# Altium PCB PCB1 (1).PcbDoc
Units mil, origin at the board's own origin, x right, y up, seen from the top; angles counter-clockwise.
Board outline 4500 x 2400 mil, 2 copper layers (Top Layer, Bottom Layer); 9 components, 22 nets, 71 pads, 0 vias.
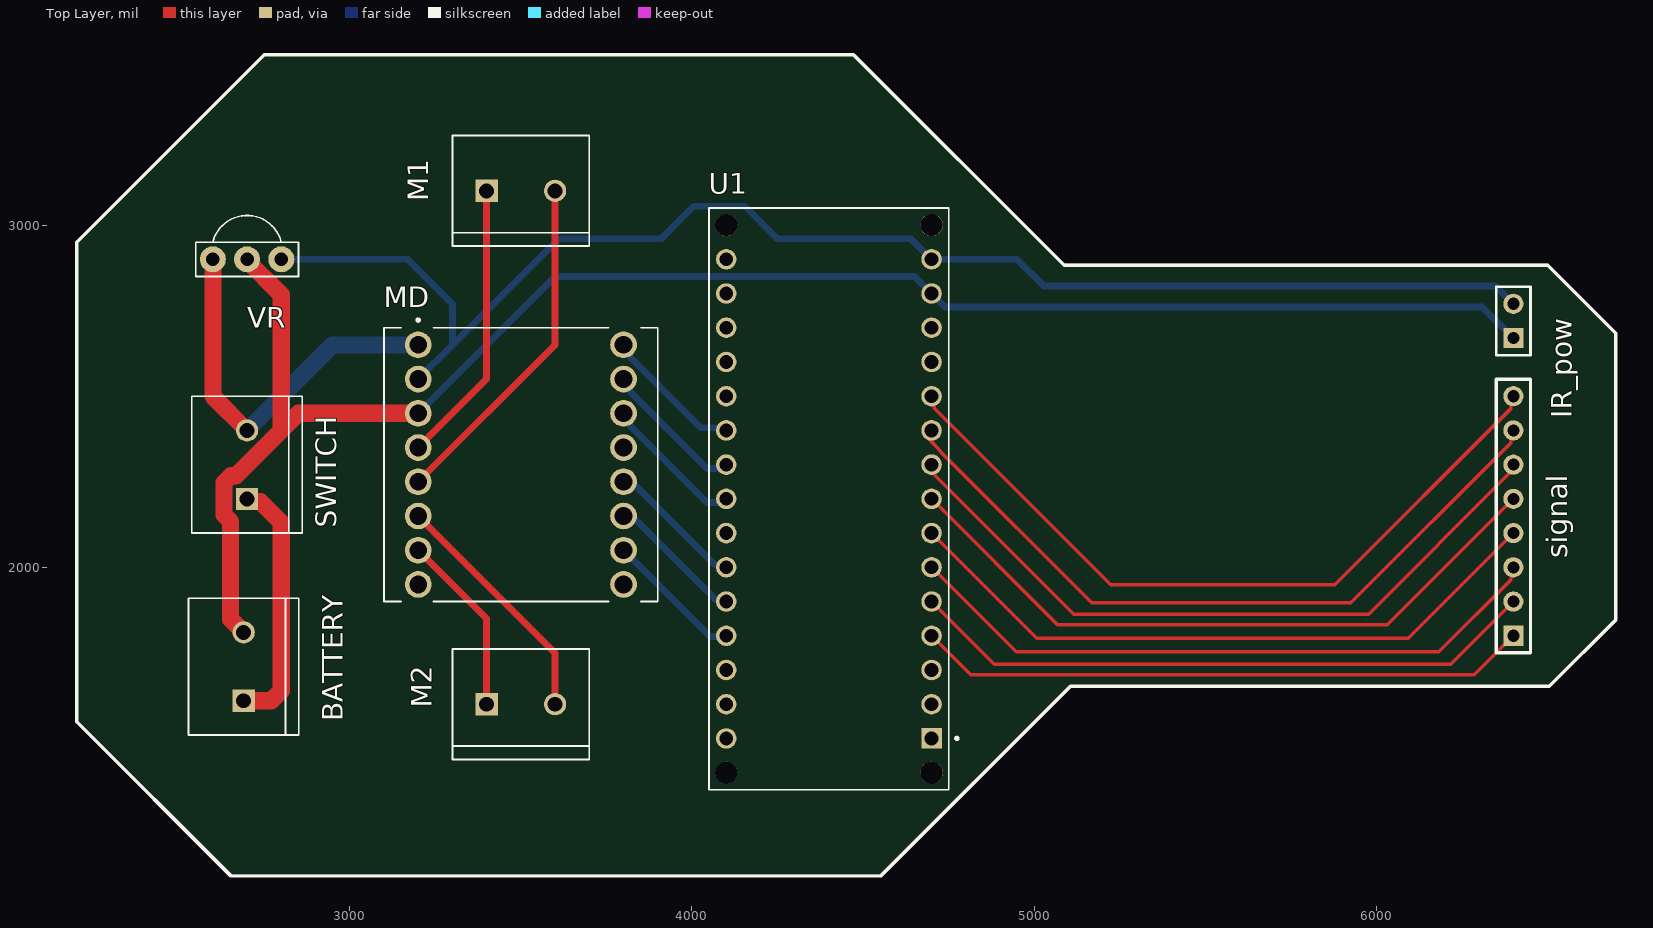
[diagram p0: Top Layer view]
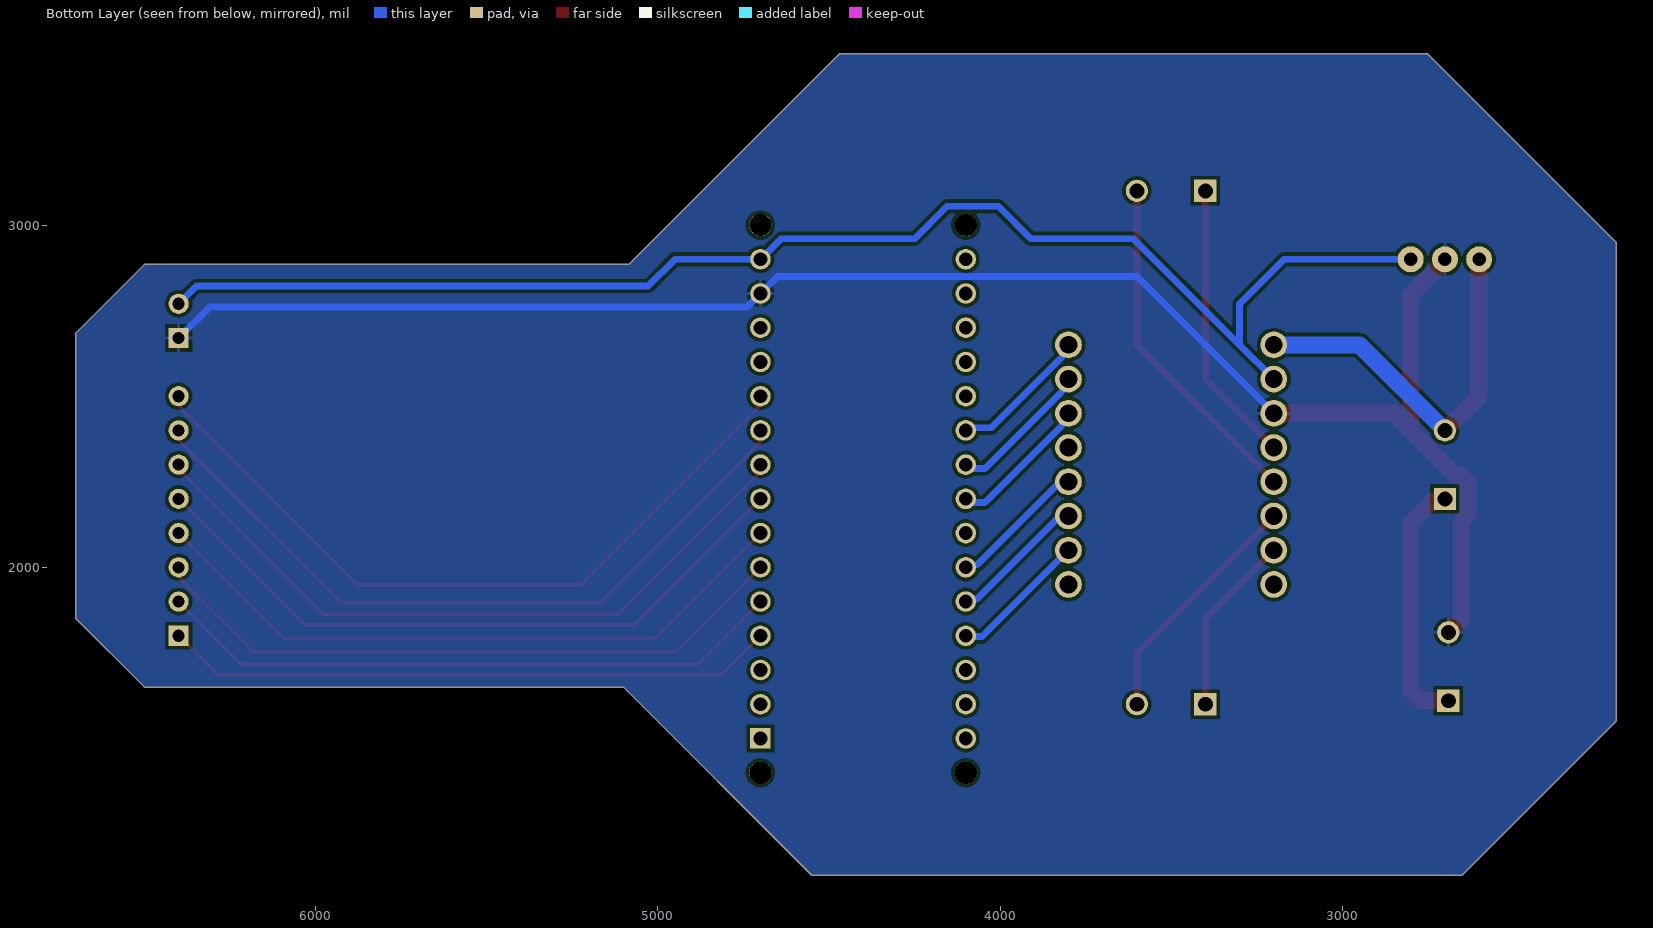
[diagram p1: Bottom Layer view, seen from below]
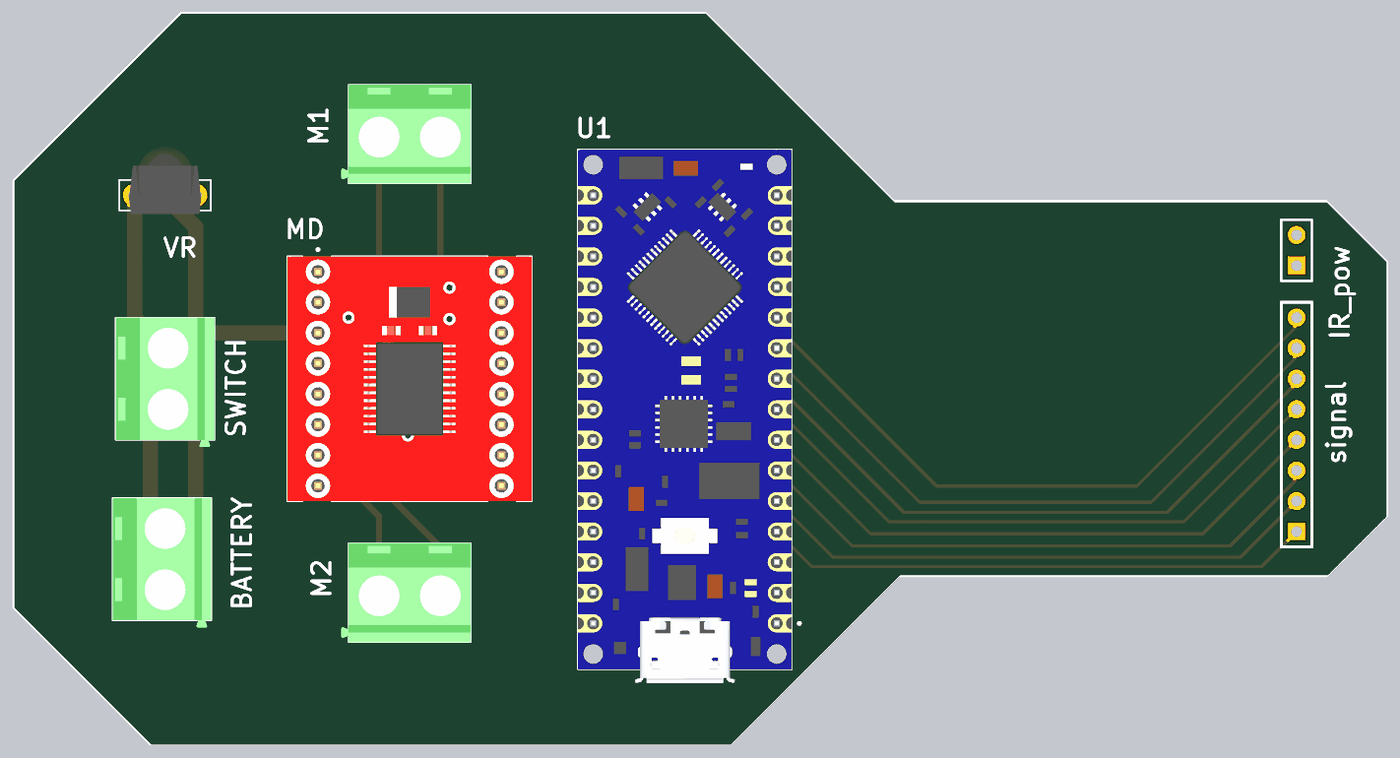
[diagram p2: 3D render of the assembled board from above, using the file's embedded part models]

## Layer stack, top to bottom
Top Solder: solder mask 0.4, Solder Resist, Dk 3.5
Top Layer: signal copper 1.4
Dielectric 1: dielectric 12.6, FR-4, Dk 4.8
Bottom Layer: signal copper 1.4
Bottom Solder: solder mask 0.4, Solder Resist, Dk 3.5

## Board outline
6700,1850 6500,1650 5100,1650 4550,1100 2650,1100 2200,1550 2200,2950 2750,3500 4470,3500 5085,2885 6500,2885 6700,2685

## Design rules (kind name [scope] priority, off if disabled: settings)
Clearance [All] p1: gap=10 ignorepadtopadclearanceinfootprint=FALSE ismatrix=TRUE
MinimumSolderMaskSliver [All] p1: minsoldermaskwidth=1
PlaneConnect [All] p1: planeconnectstyle=Direct reliefexpansion=20 reliefentries=4 reliefconductorwidth=10 reliefairgap=10
PolygonConnect [All] p1: connectstyle=Relief reliefconductorwidth=10 reliefentries=4 polygonreliefangle="90 Angle" airgapwidth=10
RoutingVias [All] p1: holewidth=28 width=50 viastyle="Through Hole" minholewidth=28 minwidth=50 maxholewidth=28 maxwidth=50
SilkToSilkClearance [All] p1: silktosilkclearance=1
SilkToSolderMaskClearance [IsPad] p1: minsilkscreentomaskgap=1 clearancetoexposedcopper=TRUE
SolderMaskExpansion [All] p1: expansion=4 istentingtop=FALSE
Width [All] p1: maxlimit=50 minlimit=10 preferedwidth=20 minimp=50.000000 maximp=50.000000 favimp=50.000000
26 further rules are at their usual default settings.

## Components (designator, comment, footprint, x,y, rotation, side; value= is the part's Value field where it differs from the comment)
BATTERY "282837-2" TE_282837-2 2690,1710 r90 top
IR_pow "Header 2" HDR1X2 6400,2670 r90 top
M1 "282837-2" TE_282837-2 3500,3100 r0 top
M2 "282837-2" TE_282837-2 3500,1600 r0 top
MD "ROB-14450" MODULE_ROB-14450 3500,2300 r0 top
signal "Header 8" HDR1X8 6400,1800 r90 top
SWITCH "282837-2" TE_282837-2 2700,2300 r90 top
U1 "ABX00028" MODULE_ABX00028 4400,2200 r90 top
VR "TSOP1838" TSOP1838 2700,2900 r180 top

## Footprints (in the part's own frame and the unit in brackets; to place one, negate y for a bottom-side part, rotate by r counter-clockwise, add the part's x,y. Pads: shape width x height; smd on the part's side, far side on the other; paste and mask are expansions set on the pad)
HDR1X2 [mm] "Connector; Header; 2 Position"
  rect 1.5x1.5 hole 0.9: 1(0,0)
  round 1.5 hole 0.9: 2(2.54,0)
  silkscreen extent -1.27,-1.27 3.81,1.27
HDR1X8 [mm] "Connector; Header; 8 Position"
  rect 1.5x1.5 hole 0.9: 1(0,0)
  round 1.5 hole 0.9: 2(2.54,0) 3(5.08,0) 4(7.62,0) 5(10.16,0) 6(12.7,0) 7(15.24,0) 8(17.78,0)
  silkscreen extent -1.27,-1.27 19.05,1.27
MODULE_ABX00028 [mil]
  rect 60x60 / inner round 60 / far side rect 60x60 hole 40: 1(-700,-300)
  round 60 hole 40: 2(-600,-300) 3(-500,-300) 4(-400,-300) 5(-300,-300) 6(-200,-300) 7(-100,-300) 8(0,-300) 9(100,-300) 10(200,-300) 11(300,-300) 12(400,-300) 13(500,-300) 14(600,-300) 15(700,-300) 16(700,300) 17(600,300) 18(500,300) 19(400,300) 20(300,300) 21(200,300) 22(100,300) 23(0,300) 24(-100,300) 25(-200,300) 26(-300,300) 27(-400,300) 28(-500,300) 29(-600,300) 30(-700,300)
  round 65 hole 65 unplated: ""(-800,-300) ""(-800,300) ""(800,-300) ""(800,300)
  silkscreen extent -850,-378 850,350, body extent -895,-350 850,350, height 236
MODULE_ROB-14450 [mm]
  round 1.98 hole 1.32: 1(-7.62,8.89) 2(-7.62,6.35) 3(-7.62,3.81) 4(-7.62,1.27) 5(-7.62,-1.27) 6(-7.62,-3.81) 7(-7.62,-6.35) 8(-7.62,-8.89) 9(7.62,-8.89) 10(7.62,-6.35) 11(7.62,-3.81) 12(7.62,-1.27) 13(7.62,1.27) 14(7.62,3.81) 15(7.62,6.35) 16(7.62,8.89)
  silkscreen extent -10.16,-10.16 10.16,10.83, body extent -10.16,-10.16 10.16,10.16, height 5.5
TE_282837-2 [mm]
  rect 1.65x1.65 / inner round 1.65 / far side rect 1.65x1.65 hole 1.1: 1(-2.54,0)
  round 1.65 hole 1.1: 2(2.54,0)
  silkscreen extent -5.08,-4.1 5.08,4.1, body extent -5.68,-4.1 5.08,4.1, height 10
TSOP1838 [mil]
  round 76 hole 39.37: 1(-100,0) 2(0,0) 3(100,0)
  silkscreen extent -150,-128 150,50, body extent -118,-159 118,61, height 404

## Part data
BATTERY M1 M2 SWITCH: "Ð Ð°Ð·ÑŠÐµÐ¼Ð½Ñ‹Ðµ ÐºÐ»ÐµÐ¼Ð¼Ð½Ñ‹Ðµ ÐºÐ¾Ð»Ð¾Ð´ÐºÐ¸ Ð Ð¾Ð·ÐµÑ‚ÐºÐ° 2 Ð¿Ð¾Ð»Ð¾Ð¶ÐµÐ½Ð¸Ñ 5,08 Ð¼Ð¼ ÐŸÑ€Ð¸Ð¿Ð¾Ð¹ Ð¿Ñ€ÑÐ¼Ð¾Ð¹ Ñ‡ÐµÑ€ÐµÐ· Ð¾Ñ‚Ð²ÐµÑ€ÑÑ‚Ð¸Ðµ 13,5 Ð / ÐºÐ¾Ð½Ñ‚Ð°ÐºÑ‚", Package=None, Availability="In Stock", Check_prices=https://www.snapeda.com/parts/282837-2/TE+Connectivity+AMP+Connectors/view-part/?ref=eda, MF="TE Connectivity", MP=282837-2, Price=None, Purchase-URL=https://pricing.snapeda.com/search/part/282837-2/?ref=eda, SnapEDA_Link=https://www.snapeda.com/parts/282837-2/TE+Connectivity+AMP+Connectors/view-part/?ref=snap
IR_pow: "Header, 2-Pin", LatestRevisionDate=17-Jul-2002, LatestRevisionNote="Re-released for DXP Platform.", Publisher="Altium Limited"
MD: "TB6612FNG Motor Controller/Driver Power Management Evaluation Board", Package=None, Availability="In Stock", Check_prices=https://www.snapeda.com/parts/ROB-14450/SparkFun%20Electronics/view-part/2656367/?ref=eda, MF="SparkFun Electronics", MP=ROB-14450, Price=None, SnapEDA_Link=https://www.snapeda.com/parts/ROB-14450/SparkFun%20Electronics/view-part/2656367/?ref=snap
signal: "Header, 8-Pin", LatestRevisionDate=17-Jul-2002, LatestRevisionNote="Re-released for DXP Platform.", Publisher="Altium Limited"
U1: "Arduinoâ€™s 5V compatible board in the smallest available form factor: 45x18mm!", Package=None, Availability="Not in stock", Check_prices=https://www.snapeda.com/parts/Arduino%20Nano%20Every/Arduino/view-part/?ref=eda, MF=Arduino, MP="Arduino Nano Every", Price=None, SnapEDA_Link=https://www.snapeda.com/parts/Arduino%20Nano%20Every/Arduino/view-part/?ref=snap
VR: "IR Remote Receiver 38KHz 35m 3-Pin", Package=None, Check_prices=https://www.snapeda.com/parts/TSOP1838/Vishay/view-part/?ref=eda, MF=Vishay, MP=TSOP1838, SnapEDA_Link=https://www.snapeda.com/parts/TSOP1838/Vishay/view-part/?ref=snap

## Nets (pads, with @x,y where several pads share a name; then routed paths per layer and width w, separated by ;. In a path a pad name is that pad's centre, name@x,y a point inside that pad or via, vN(x,y) a via of type N, cw(c..) or ccw(c..) an arc to the next point about the centre after c; other vN are vias at no path point)
12V: BATTERY.1 SWITCH.1 | length 742.6
  Top Layer w50: BATTERY.1 2770.71,1610 2800,1639.29 2800,2131.25 2738.73,2192.52 2707.48,2192.52 SWITCH.1
A0: signal.1 U1.4 | length 1794.4
  Top Layer w10: U1.4 4814,1686 6286,1686 signal.1
A1: signal.2 U1.5 | length 1851.6
  Top Layer w10: U1.5 4883,1717 6217,1717 signal.2
A2: signal.3 U1.6 | length 1921.6
  Top Layer w10: U1.6 4947,1753 6182,1753 6393.01,1964.01 6393.01,1993.01 signal.3
A3: signal.4 U1.7 | length 1954.3
  Top Layer w10: U1.7 5007,1793 6093,1793 signal.4
A4: signal.5 U1.8 | length 2004.9
  Top Layer w10: U1.8 5068,1832 6032,1832 signal.5
A5: signal.6 U1.9 | length 2083.1
  Top Layer w10: U1.9 4709.57,2290.43 4709.57,2268.43 5115,1863 5977,1863 6385.51,2271.51 6385.51,2272.24 6400,2286.73 signal.6
A6: signal.7 U1.10 | length 2164.3
  Top Layer w10: U1.10 4688.28,2388.28 4688.28,2380 4708.47,2357.86 cw(c4677.48,2329.59) 4708.56,2357.77 4715.39,2350.17 4733.37,2330.19 5167.56,1896 5925,1896 6393.01,2364.01 6393.01,2393.01 signal.7
A7: signal.8 U1.11 | length 2189.9
  Top Layer w10: U1.11 4707.82,2492.18 4707.82,2464.18 5223,1949 5878,1949 6393.01,2464.01 6393.01,2493.01 signal.8
ENA: MD.16 U1.21 | length 413.3
  Bottom Layer w20: MD.16 3800,2634.32 3820.48,2613.84 3820.48,2612.93 4011.41,2422 4025.78,2407.63 4092.37,2407.63 U1.21
ENB: MD.10 U1.27 | length 405.7
  Bottom Layer w20: MD.10 4052.57,1797.43 4097.43,1797.43 U1.27
GND: BATTERY.2 IR_pow.1 MD.3 U1.14 VR.2 | length 5094
  Top Layer w50: BATTERY.2 2652,1848 2652,2133.54 2632.52,2153.02 2632.52,2246.98 2653.02,2267.48 2667.48,2267.48 2800,2400 ; VR.2 2700,2896.76 2800,2796.76 2800,2400 ; MD.3 2850,2450 2800,2400
  Bottom Layer w20: MD.3 3600,2850 4650,2850 4739,2761 6309,2761 IR_pow.1
IN1: MD.14 U1.23 | length 422.4
  Bottom Layer w20: MD.14 3800,2434.32 3820.48,2413.84 3820.48,2412.93 4044.41,2189 4078.18,2189 4089.18,2200 U1.23
IN2: MD.15 U1.22 | length 422.4
  Bottom Layer w20: MD.15 3800,2534.32 3820.48,2513.84 3820.48,2512.93 4044.41,2289 4078.18,2289 4089.18,2300 U1.22
IN3: MD.12 U1.25 | length 403.6
  Bottom Layer w20: MD.12 3811.09,2238.91 3835.09,2238.91 4066.35,2007.65 4092.35,2007.65 U1.25
IN4: MD.11 U1.26 | length 403.6
  Bottom Layer w20: MD.11 3811.09,2138.91 3836.09,2138.91 4067.35,1907.65 4092.35,1907.65 U1.26
M11: M1.1 MD.4 | length 832.8
  Top Layer w20: MD.4 3400,2550 M1.1
M12: M1.2 MD.5 | length 1015.7
  Top Layer w20: MD.5 3600,2650 M1.2
M21: M2.1 MD.7 | length 532.8
  Top Layer w20: MD.7 3400,1850 M2.1
M22: M2.2 MD.6 | length 715.7
  Top Layer w20: MD.6 3600,1750 M2.2
POW: MD.1 SWITCH.2 VR.3 | length 1145
  Top Layer w50: VR.3 2600,2500 SWITCH.2
  Bottom Layer w50: SWITCH.2 2950,2650 MD.1
vin: IR_pow.2 MD.2 U1.15 VR.1 | length 4201.1
  Bottom Layer w20: VR.1 3170,2900 3300,2770 3300,2650 ; MD.2 3300,2650 ; IR_pow.2 6348,2822 5028,2822 4950,2900 U1.15 4640,2960 4250,2960 4155,3055 4005,3055 3910,2960 3610,2960 3300,2650
pads on no net: MD.8 MD.9 MD.13 U1. U1.1 U1.2 U1.3 U1.12 U1.13 U1.16 U1.17 U1.18 U1.19 U1.20 U1.24 U1.28 U1.29 U1.30

## Polygon pours and split planes (outlines as drawn)
GND on Bottom Layer "gnd" (solid, remove dead copper, pour order 0): 6700,1850 6500,1650 5100,1650 4550,1100 2650,1100 2200,1550 2200,2950 2750,3500 4470,3500 5085,2885 6500,2885 6700,2685

## Silkscreen, mask and mechanical layers (free items; w line width, h text height)
Top Overlay:
  lines w10: 2202,1549 2202,2950 2750,3498 4472,3498 5088,2882 6501,2882 6699,2684 6699,1846 6505,1652 5106,1652 4552,1098 2653,1098 2202,1549
Mechanical 1:
  lines w10: 2198.48,1549.27 2649.48,1098.27 4548.48,1098.27 5102.48,1652.27 6501.48,1652.27 6695.48,1846.27 6695.48,2684.27 6497.48,2882.27 5084.48,2882.27 4468.48,3498.27 2746.48,3498.27 2198.48,2950.27 2198.48,1549.27